# EAGLE board sensor (EAGLE 9.6.2)
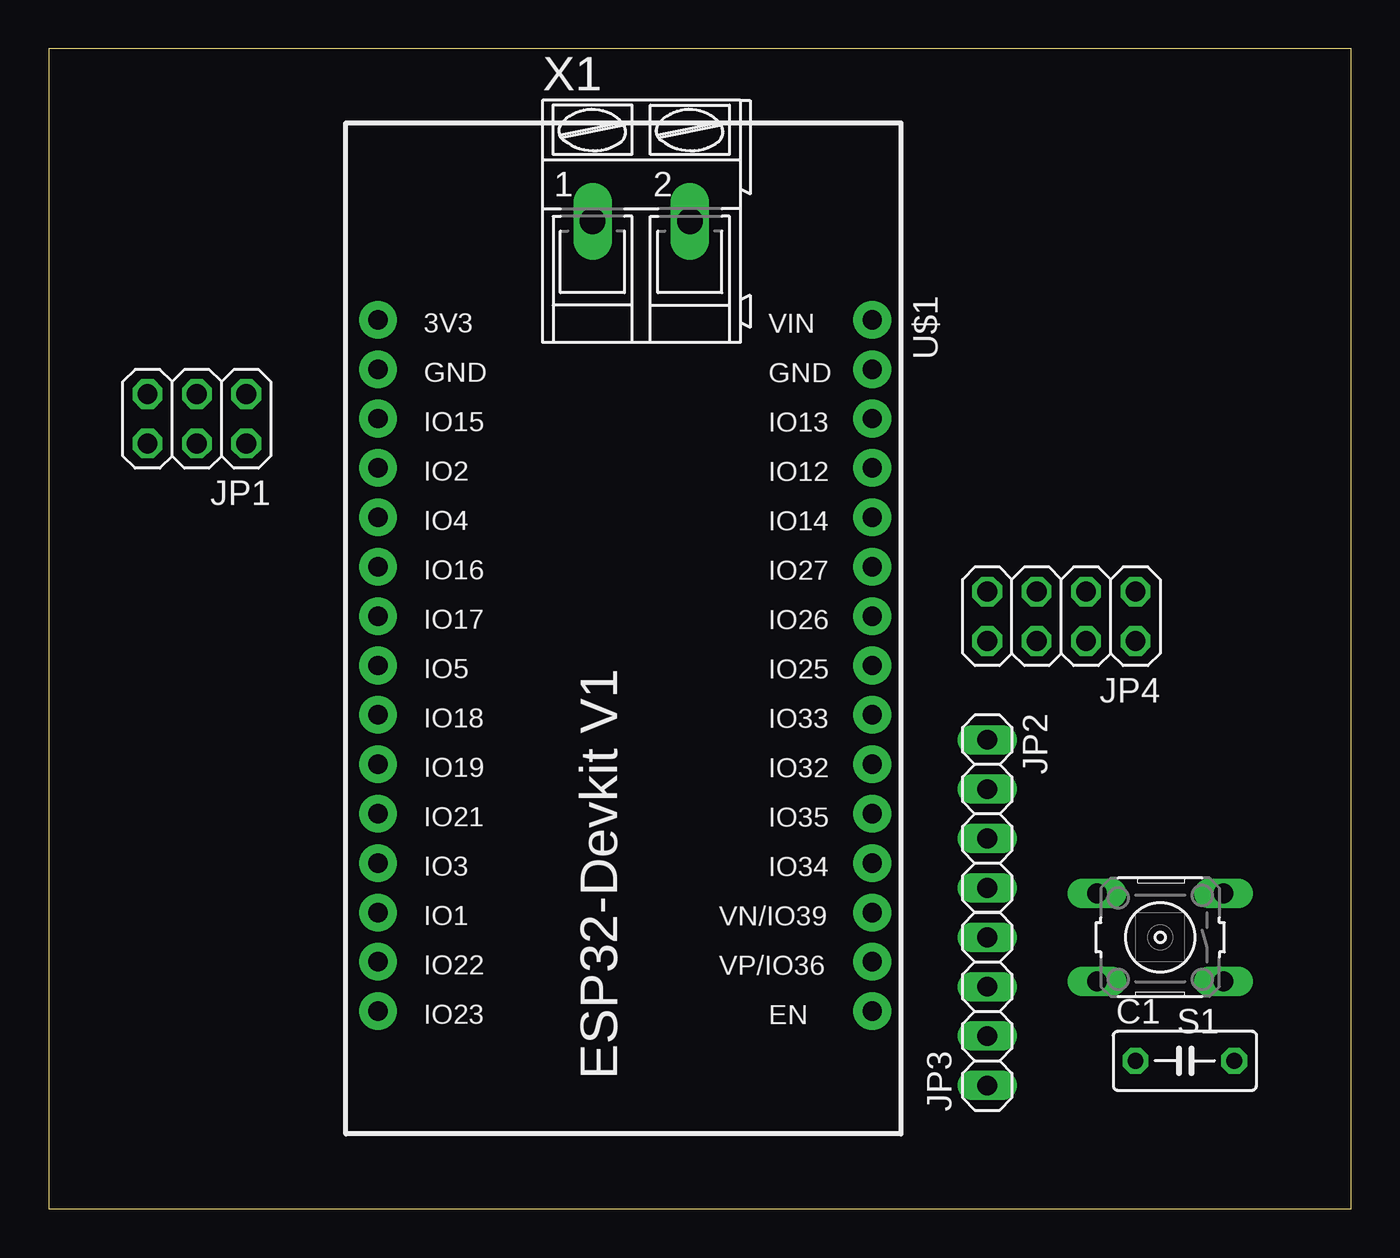
[diagram p0: board, top side]
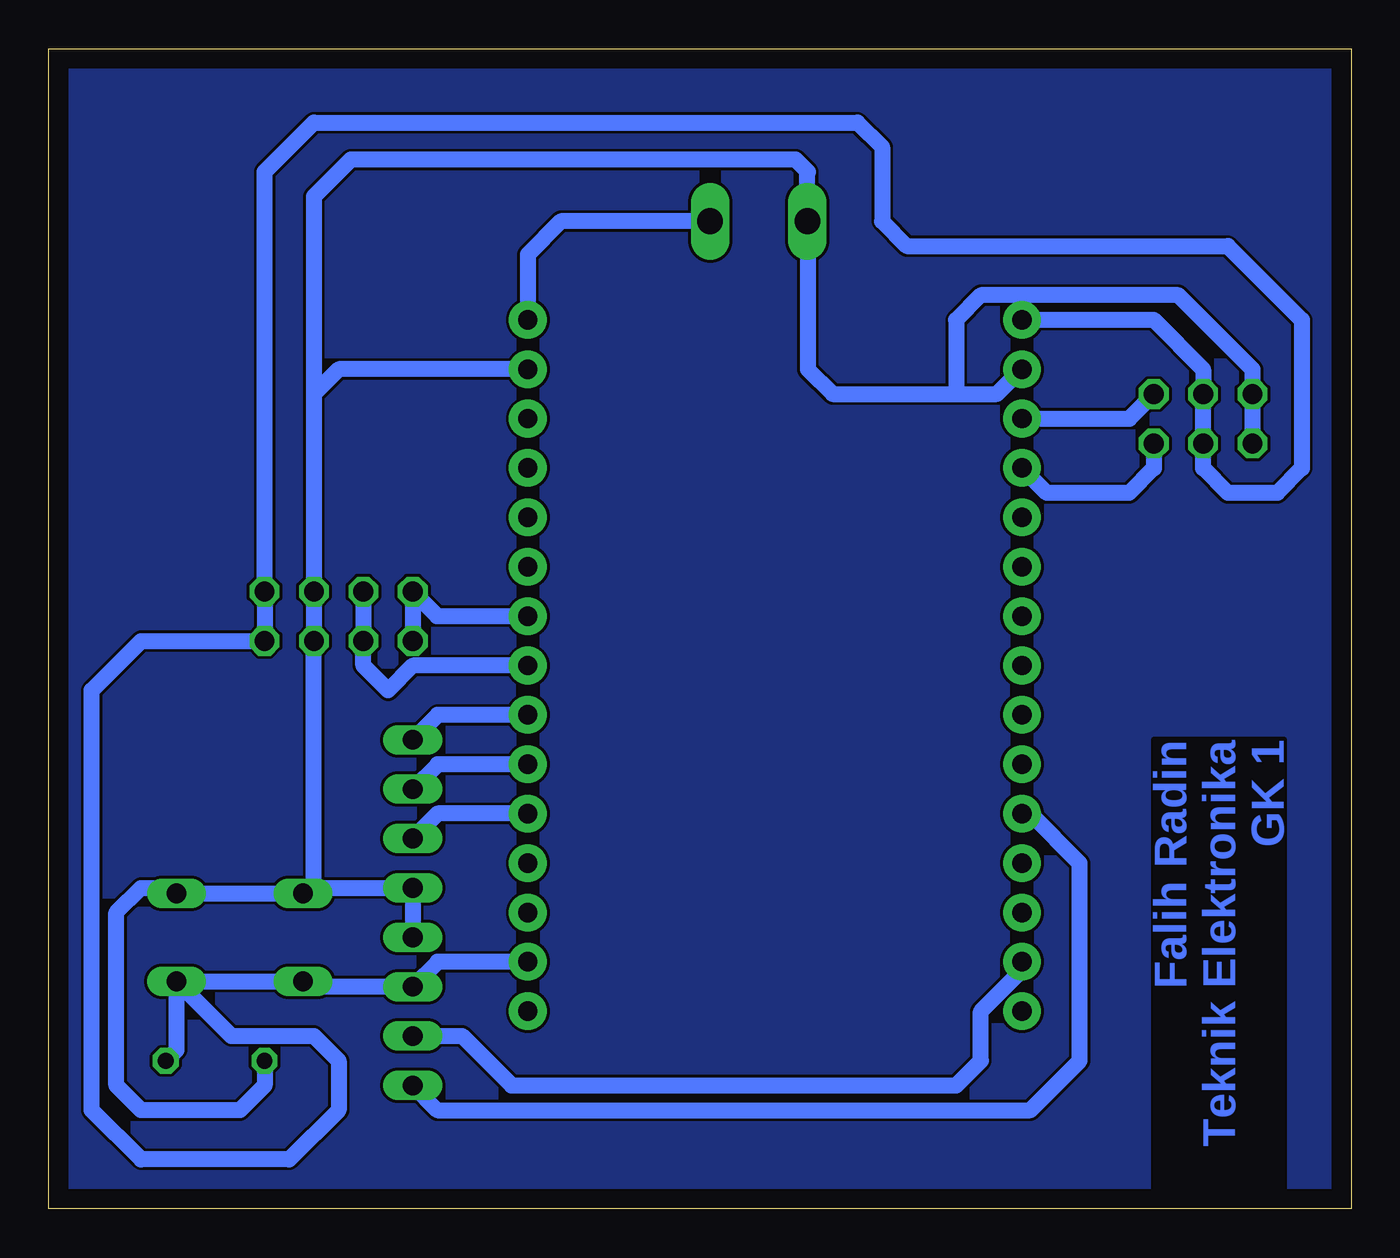
[diagram p1: board, bottom side, seen from below]

Size 66.98 x 59.68 mm. Coordinates in mm from the lower left corner, seen from the top.
Outline: 0,0 66.98,0 66.98,59.68 0,59.68 0,0
Copper layers (1*16): Top 0.035mm / dielectric 1.5mm / Bottom 0.035mm
Design rules "default": minimum track width 6mil, minimum drill 0.35mm, track to track 6mil, track to pad 6mil, pad to pad 6mil, via to via 6mil, smd to smd 6mil, copper to edge 40mil, drill to drill 6mil, minimum pad ring 10mil, minimum via ring 8mil, stop-mask expansion 4mil, vias tented up to drill 0mil, thermal gap 10mil

## Footprints (pad centres in the part's own frame; a part is rotated, then mirrored left to right if it is on the bottom)
C050-030X075 = drill 0.813 octagon: 1 -2.54,0; 2 2.54,0
2X03 = drill 1.016 octagon: 1 -2.54,-1.27; 2 -2.54,1.27; 3 0,-1.27; 4 0,1.27; 5 2.54,-1.27; 6 2.54,1.27
1X04 = drill 1.016 long: 1 -3.81,0; 2 -1.27,0; 3 1.27,0; 4 3.81,0
2X04 = drill 1.016 octagon: 1 -3.81,-1.27; 2 -3.81,1.27; 3 -1.27,-1.27; 4 -1.27,1.27; 5 1.27,-1.27; 6 1.27,1.27; 7 3.81,-1.27; 8 3.81,1.27
B3F-10XX = drill 1.016 long: 1 -3.251,2.261; 2 3.251,2.261; 3 -3.251,-2.261; 4 3.251,-2.261
ESP32-DEVKITV1 = drill 1 pad 1.93: 3V3 -16.52,-12.27; D1 13.96,-12.27; D2 -8.9,-12.27; D3 11.42,-12.27; D4 -6.36,-12.27; D5 1.26,-12.27; D12 -8.9,13.135; D13 -11.44,13.135; D14 -6.36,13.135; D15 -11.44,-12.27; D16 -3.82,-12.27; D17 -1.28,-12.27; D18 3.8,-12.27; D19 6.34,-12.27; D21 8.88,-12.27; D22 16.5,-12.27; D23 19.04,-12.27; D25 1.26,13.135; D26 -1.28,13.135; D27 -3.82,13.135; D32 6.34,13.135; D33 3.8,13.135; D34 11.42,13.135; D35 8.88,13.135; D36 16.5,13.135; D39 13.96,13.135; EN 19.04,13.135; GND@1 -13.98,13.135; GND@2 -13.98,-12.27; VIN -16.52,13.135
AK300/2 = drill 1.321 long: 1 -2.515,0; 2 2.489,0

## Placement (x,y rotation side)
C1  [C050-030X075]  58.42,7.62 0 top
JP1  [2X03]  7.62,40.64 180 top
JP2  [1X04]  48.26,20.32 270 top
JP3  [1X04]  48.26,10.16 90 top
JP4  [2X04]  52.07,30.48 180 top
S1  [B3F-10XX]  57.15,13.97 180 top
U$1  ESP32DEVKITV1  [ESP32-DEVKITV1]  29.21,29.21 270 top
X1  [AK300/2]  30.48,50.8 0 top

## Library data of the parts
C1 = rcl; SPICEPREFIX: C
JP1-JP4 = pinhead
S1 = switch-omron; MPN: B3F-1000; OC_FARNELL: 176432; OC_NEWARK: 36M3542
U$1 = esp32-devkitv1
X1 = con-ptr500; OC_FARNELL: unknown; OC_NEWARK: unknown

## Nets
GND: C1.1 JP1.5 JP1.6 JP2.4 JP3.4 JP4.3 JP4.4 S1.3 S1.4 U$1.GND@1 U$1.GND@2 X1.1
MOISTURE: JP1.2 U$1.D2
OUT1: JP2.1 U$1.D33
OUT2: JP2.2 U$1.D32
OUT3: JP2.3 U$1.D35
PH: JP1.1 U$1.D15
SCL: JP3.2 U$1.D22
SCL2: JP4.5 JP4.6 U$1.D25
SDA: JP3.1 U$1.D21
SDA2: JP4.7 JP4.8 U$1.D26
V: C1.2 JP1.3 JP1.4 JP3.3 JP4.1 JP4.2 S1.1 S1.2 U$1.3V3 U$1.D36
VIN: U$1.VIN X1.2

## Tracks (layer width: path | path; a pad name or v marks a point on that pad's centre or on a via)
GND
  Bottom 0.813: C1.1 55.88,6.35 57.15,5.08 62.23,5.08 63.5,6.35 63.5,15.24 62.23,16.51 60.68,16.51 S1.3 S1.4 | S1.4 53.62,16.51 JP2.4 JP3.4 | S1.4 53.34,16.79 JP4.4 JP4.3 53.34,41.91 | 53.34,41.91 53.34,52.07 51.43,53.98 28.58,53.98 27.94,53.34 27.96,53.32 X1.1 27.94,50.78 27.94,43.18 26.67,41.91 20.32,41.91 | U$1.GND@1 52.06,43.19 53.34,41.91 | U$1.GND@2 18.22,41.91 20.32,41.91 | JP1.6 JP1.5 5.08,43.18 8.89,46.99 19.05,46.99 20.32,45.72 20.32,41.91
MOISTURE
  Bottom 0.813: JP1.2 10.16,38.1 11.43,36.83 15.66,36.83 U$1.D2
N$1
  pour Bottom: 0,59.69 67.31,59.69 67.31,0 0,0
OUT1
  Bottom 0.813: U$1.D33 46.98,25.41 JP2.1
OUT2
  Bottom 0.813: U$1.D32 46.98,22.87 JP2.2
OUT3
  Bottom 0.813: U$1.D35 46.98,20.33 JP2.3
PH
  Bottom 0.813: U$1.D15 11.42,40.65 JP1.1
SCL
  Bottom 0.813: JP3.2 45.72,8.89 43.18,6.35 20.32,6.35 19.05,7.62 19.05,10.16 16.94,12.27 U$1.D22
SCL2
  Bottom 0.813: JP4.5 JP4.6 50.8,27.94 49.53,26.67 48.25,27.95 U$1.D25
SDA
  Bottom 0.813: JP3.1 46.99,5.08 16.51,5.08 13.97,7.62 13.97,17.78 16.52,20.33 U$1.D21
SDA2
  Bottom 0.813: JP4.8 JP4.7 47,30.49 U$1.D26
V
  Bottom 0.813: U$1.D36 46.98,12.71 JP3.3 | JP3.3 | C1.2 60.4,8.18 S1.1 | JP3.3 53.63,11.44 S1.2 S1.1 | S1.1 57.58,8.89 53.34,8.89 52.07,7.62 52.07,5.08 54.61,2.54 62.23,2.54 64.77,5.08 64.77,26.67 62.23,29.21 JP4.2 JP4.1 55.88,53.34 53.34,55.88 25.4,55.88 24.13,54.61 24.13,50.8 22.86,49.53 6.35,49.53 2.54,45.72 2.54,38.1 3.81,36.83 6.35,36.83 7.62,38.1 JP1.4 JP1.3 7.62,43.18 10.17,45.73 U$1.3V3
VIN
  Bottom 0.813: X1.2 40.64,50.8 42.34,49.1 U$1.VIN

## Text on the board
Bottom: Falih Radin / Teknik Elektronika / GK 1